# Altium PCB CW308T_D2000.PcbDoc
Units mil, origin at the board's own origin, x right, y up, seen from the top; angles counter-clockwise.
Board outline 2060 x 2540 mil, 2 copper layers (Top Layer, Bottom Layer); 12 components, 25 nets, 128 pads, 130 vias.
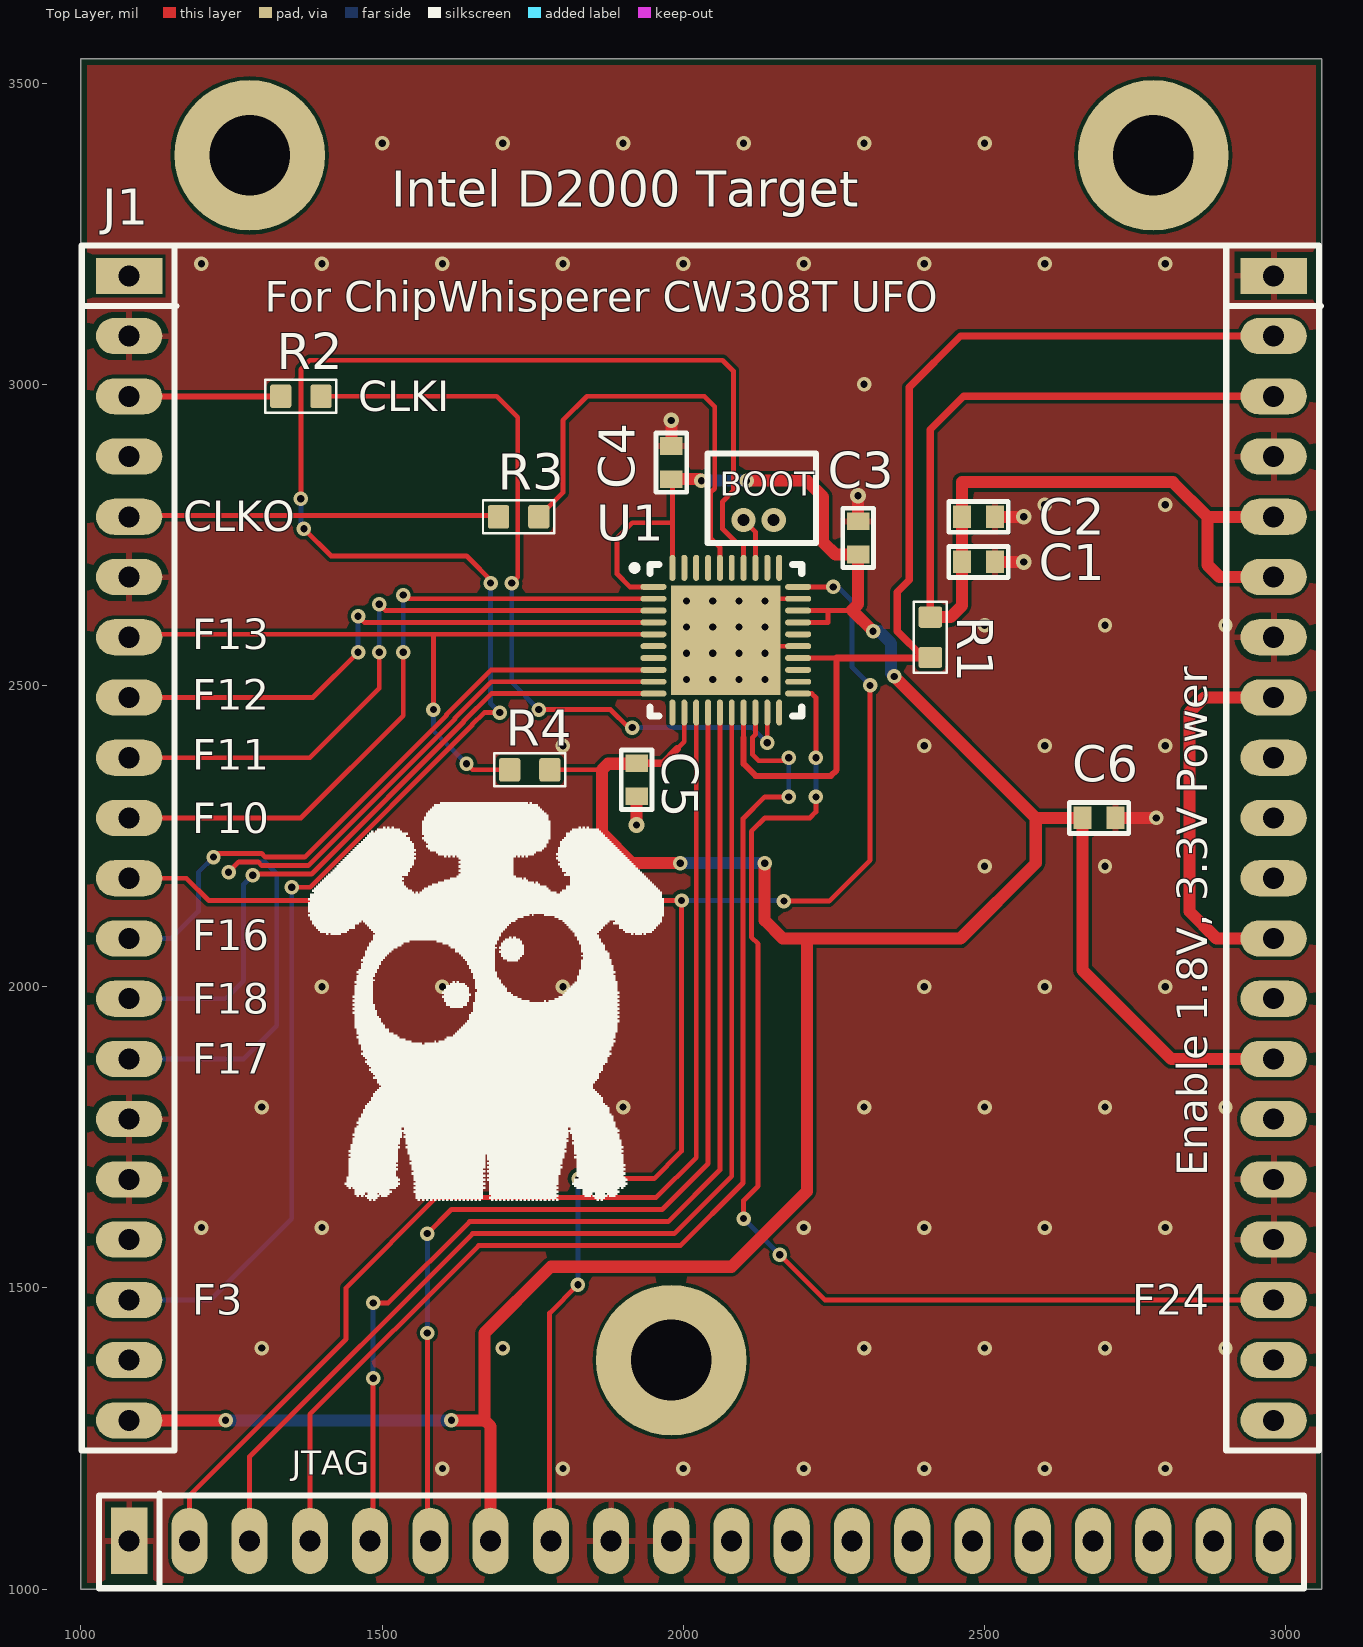
[diagram p0: Top Layer view]
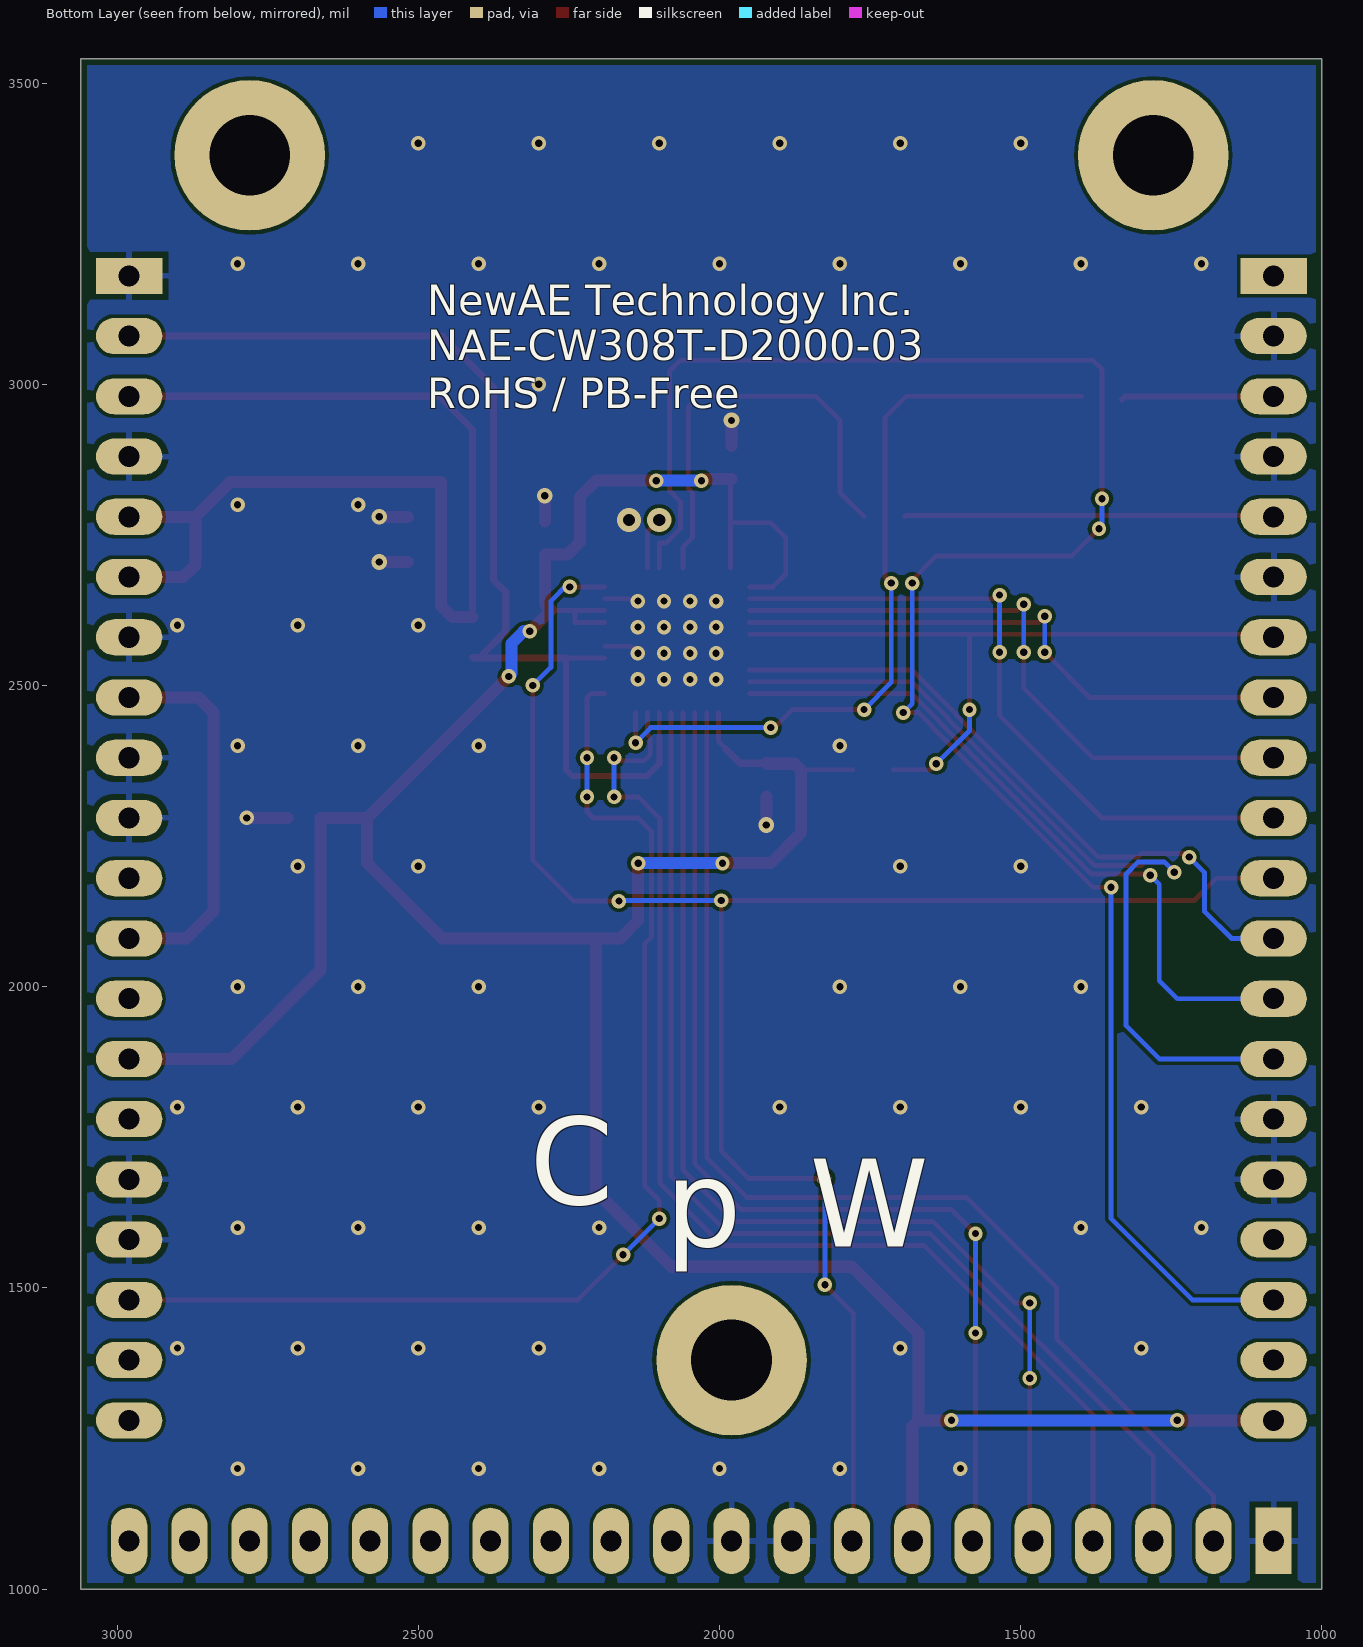
[diagram p1: Bottom Layer view, seen from below]

## Layer stack, top to bottom
Top Solder: solder mask 0.4, Solder Resist, Dk 3.5
Top Layer: signal copper 1.4
Dielectric 1: dielectric 12.6, FR-4, Dk 4.8
Bottom Layer: signal copper 1.4
Bottom Solder: solder mask 0.4, Solder Resist, Dk 3.5

## Board outline
1000,1000 1000,3540 3060,3540 3060,1000

## Design rules (kind name [scope] priority, off if disabled: settings)
BoardOutlineClearance [All] p1: gap=10 ignorepadtopadclearanceinfootprint=FALSE
Clearance [All] p1: gap=6 ignorepadtopadclearanceinfootprint=FALSE except(0: Arc-Hole Track-Hole SMDPad-Hole THPad-Hole Via-Hole Fill-Hole Poly-Hole Region-Hole Text-Hole)
MinimumSolderMaskSliver [All] p1: minsoldermaskwidth=4
PasteMaskExpansion PasteMaskExpansion_1 [InComponent('U1')] p1: expansion=-1.5
PasteMaskExpansion [All] p2: expansion=0
PolygonConnect PolygonConnect_via [isVia] p1: connectstyle=Direct reliefconductorwidth=10 reliefentries=4 polygonreliefangle="90 Angle" airgapwidth=10
PolygonConnect PolygonConnect_other [All] p2: connectstyle=Relief reliefconductorwidth=10 reliefentries=4 polygonreliefangle="90 Angle" airgapwidth=10
RoutingVias [All] p1: holewidth=12 width=24 viastyle="Through Hole" minholewidth=11.81 minwidth=24 maxholewidth=30 maxwidth=50
SilkToSilkClearance [All] p1: silktosilkclearance=1
SilkToSolderMaskClearance [IsPad] p1: minsilkscreentomaskgap=5.5 clearancetoexposedcopper=TRUE
SolderMaskExpansion SolderMaskExpansion_1 [InComponent('U1')] p1: expansion=6
SolderMaskExpansion [All] p2: expansion=4
Width [All] p1: maxlimit=20 minlimit=6 preferedwidth=6 minimp=50.000000 maximp=50.000000 favimp=50.000000
26 further rules are at their usual default settings.

## Components (designator, comment, footprint, x,y, rotation, side; value= is the part's Value field where it differs from the comment)
C1 "100n" CAPC0603_M 2490,2705 r0 top
C2 "100n" CAPC0603_M 2490,2780 r0 top
C3 "100n" CAPC0603_M 2290,2745 r90 top
C4 "100n" CAPC0603_M 1980,2870 r90 top
C5 "100n" CAPC0603_M 1922.28,2343.46 r270 top
C6 "100n" CAPC0603_M 2690,2280 r0 top
J1 "CW308_TARGETCON" CW308_TBOARD_CONN 1080,3180 r0 top locked
R1 "10R" RESC1608X55N 2410,2580 r90 top
R2 "51R" RESC1608X55N 1365,2980 r180 top
R3 "51R" RESC1608X55N 1726.54,2780 r0 top
R4 "4k7" RESC1608X55N 1745,2360 r180 top
U1 "FND2000" QFN50P595X595X90_HS-41M 2070.47,2575.08 r0 top

## Footprints (in the part's own frame and the unit in brackets; to place one, negate y for a bottom-side part, rotate by r counter-clockwise, add the part's x,y. Pads: shape width x height; smd on the part's side, far side on the other; paste and mask are expansions set on the pad)
CAPC0603_M [mm]
  rect 0.75x0.95 smd: 1(-0.7,0) 2(0.7,0)
  silkscreen extent -1.25,-0.65 1.25,0.65, body extent -0.85,-0.45 0.85,0.45, height 0.9
CW308_TBOARD_CONN [mil]
  rect 110x60 hole 35: A1(0,0) C1(1900,0)
  oval 110x60 hole 35: A2(0,-100) A3(0,-200) A4(0,-300) A5(0,-400) A6(0,-500) A7(0,-600) A8(0,-700) A9(0,-800) A10(0,-900) A11(0,-1000) A12(0,-1100) A13(0,-1200) A14(0,-1300) A15(0,-1400) A16(0,-1500) A17(0,-1600) A18(0,-1700) A19(0,-1800) A20(0,-1900) C2(1900,-100) C3(1900,-200) C4(1900,-300) C5(1900,-400) C6(1900,-500) C7(1900,-600) C8(1900,-700) C9(1900,-800) C10(1900,-900) C11(1900,-1000) C12(1900,-1100) C13(1900,-1200) C14(1900,-1300) C15(1900,-1400) C16(1900,-1500) C17(1900,-1600) C18(1900,-1700) C19(1900,-1800) C20(1900,-1900)
  rect 60x110 hole 35: B1(0,-2100)
  oval 60x110 hole 35: B2(100,-2100) B3(200,-2100) B4(300,-2100) B5(400,-2100) B6(500,-2100) B7(600,-2100) B8(700,-2100) B9(800,-2100) B10(900,-2100) B11(1000,-2100) B12(1100,-2100) B13(1200,-2100) B14(1300,-2100) B15(1400,-2100) B16(1500,-2100) B17(1600,-2100) B18(1700,-2100) B19(1800,-2100) B20(1900,-2100)
  round 250 hole 134: MH1(200,200) MH2(900,-1800) MH2(1700,200)
  silkscreen extent -79,-2179 1979,50, body extent -50,-2149 1950,50, height 48
QFN50P595X595X90_HS-41M [mm] "QFN, 40-Leads, Body 5.95x5.95mm, Pitch 0.50mm, Thermal Pad 4.62x4.62mm, IPC Low Density"
  oval 1.1x0.25 smd: 1(-3.05,2.25) 2(-3.05,1.75) 3(-3.05,1.25) 4(-3.05,0.75) 5(-3.05,0.25) 6(-3.05,-0.25) 7(-3.05,-0.75) 8(-3.05,-1.25) 9(-3.05,-1.75) 10(-3.05,-2.25) 21(3.05,-2.25) 22(3.05,-1.75) 23(3.05,-1.25) 24(3.05,-0.75) 25(3.05,-0.25) 26(3.05,0.25) 27(3.05,0.75) 28(3.05,1.25) 29(3.05,1.75) 30(3.05,2.25)
  oval 0.25x1.1 smd: 11(-2.25,-3.05) 12(-1.75,-3.05) 13(-1.25,-3.05) 14(-0.75,-3.05) 15(-0.25,-3.05) 16(0.25,-3.05) 17(0.75,-3.05) 18(1.25,-3.05) 19(1.75,-3.05) 20(2.25,-3.05) 31(2.25,3.05) 32(1.75,3.05) 33(1.25,3.05) 34(0.75,3.05) 35(0.25,3.05) 36(-0.25,3.05) 37(-0.75,3.05) 38(-1.25,3.05) 39(-1.75,3.05) 40(-2.25,3.05)
  rect 4.62x4.62 smd paste-100: 41(0,0)
  silkscreen extent -3.97,-3.2 3.2,3.2, body extent -3,-3 3,3, height 0.9
RESC1608X55N [mm] "Chip Resistor, Body 1.6x0.8mm, EIA 0603, IPC Medium Density"
  round 0.254 on Mech15: 0(0,0)
  rrect25% 0.9x1 smd: 1(-0.85,0) 2(0.85,0)
  Top Layer pour cut-out: -0.6,0.5 -0.4,0.7 0.4,0.7 0.6,0.5 0.6,-0.5 0.4,-0.7 -0.4,-0.7 -0.6,-0.5
  silkscreen extent -1.5,-0.7 1.5,0.7, body extent -0.87,-0.47 0.88,0.48, height 0.54

## Part data
C1 C2 C3 C4 C5 C6: library part CCHIP-100n-0603, "100n, 0603", Case-EIA=0603, Case-Metric=1608, Component Type=Standard, Mounting Technology="Surface Mount", Part Number=CCHIP-100n-0603, Pin Count=2
J1: library part CW308_TBOARD, "CW308 \"Standard\" Target Board Connector"
R1: library part RCHIP-10R-0603, "10R, 0603", Case-EIA=0603, Case-Metric=1608, Component Type=Standard, Mounting Technology="Surface Mount", Part Number=RCHIP-10R-0603, Pin Count=2
R2 R3: library part RCHIP-51R-0603, "51R, 0603", Case-EIA=0603, Case-Metric=1608, Component Type=Standard, Mounting Technology="Surface Mount", Part Number=RCHIP-51R-0603, Pin Count=2
R4: library part RCHIP-4K7-0603, "4k7 res, 0603, 1%, 1/10W", Case-EIA=0603, Case-Metric=1608, Manufacture 1=Yageo, Manufacture Part Number 1=RC0603FR-074K7L, Rated Power=0.1W, Rated Voltage=75VDC, Supplier Part Number 1=311-4.70KHRCT-ND, Temperature Range="-55C to 155C", Tolerance=1%, Component Type=Standard, Mounting Technology=SMT, Part Number=RCHIP-4K7-0603, Pin Count=2, Supplier 1=Digi-Key
U1: library part D2000, "Intel x86 microcontroller", Manufacture 1=Intel, Manufacture Part Number 1="FND2000 S R2KF", Component Type=Standard, Part Number=D2000, Pin Count=41, Supplier 1=Arrow

## Via types
v1: diameter 24, hole 12, Top Layer to Bottom Layer, tented both sides, 88 vias
v2: diameter 24, hole 12, Top Layer to Bottom Layer, 19 vias
v3: diameter 24.02, hole 11.81, Top Layer to Bottom Layer, 16 vias
v4: diameter 26, hole 12, Top Layer to Bottom Layer, 5 vias
v5: diameter 40, hole 20, Top Layer to Bottom Layer, 2 vias

## Nets (pads, with @x,y where several pads share a name; then routed paths per layer and width w, separated by ;. In a path a pad name is that pad's centre, name@x,y a point inside that pad or via, vN(x,y) a via of type N, cw(c..) or ccw(c..) an arc to the next point about the centre after c; other vN are vias at no path point)
BOOTEN: U1.33 | length 88
  Top Layer w8: v5(2100,2775) 2119.68,2755.32 U1.33
CLKIN: J1.A3 R2.2 | length 253.6
  Top Layer w10: J1.A3 1326.54,2980 R2.2@1331.54,2975
CLKOUT: J1.A5 R3.1 | length 614.7
  Top Layer w8: J1.A5 1082,2782 1691.07,2782 R3.1
CS: J1.A18 U1.34 | length 3274.4
  Top Layer w8: v1(1350,2165) 1380.51,2165 1649,2433.49 1649,2434.6 1669.4,2455 v1(1695,2455) ; v1(1365,2810) 1365,3025 1380,3040 2065,3040 2082.98,3022.02 2082.98,2822.98 2065,2805 2065,2760 2088.5,2736.5 2100,2736.5 U1.34 ; v1(1370,2760) 1415,2715 1640,2715 1685,2670 v1(1680,2670)
  Bottom Layer w8: J1.A18 1215,1480 1350,1615 v1(1350,2165) ; v1(1365,2810) 1365,2765 v1(1370,2760) ; v1(1680,2670) 1680,2470 v1(1695,2455)
GND: C1.2 C2.2 C3.2 C4.2 C5.2 C6.2 J1.A2 J1.A4 J1.A6 J1.A15 J1.A16 J1.B1 J1.B9 J1.B10 J1.C1 J1.C4 J1.C7 J1.C9 J1.C10 J1.C16 J1.C17 U1.25 U1.29 U1.41 | length 411.4
  Top Layer w8: v3(2135.43,2553.43) 2147.24,2565.24 U1.25 ; v3(2135.43,2640.04) 2139.37,2643.98 U1.29
  Top Layer w20: v4(1922.28,2268.46) C5.2 ; C4.2 v4(1980,2940) ; C3.2 v4(2290,2815) ; C1.2 v4(2565,2705) ; C2.2 v4(2565,2780) ; C6.2 v2(2785,2280)
  other v1: 1600,1200 1800,1200 2000,1200 2200,1200 2400,1200 2600,1200 2800,1200 1300,1400 1700,1400 2300,1400 2500,1400 2700,1400 2900,1400 1200,1600 1400,1600 2200,1600 2400,1600 2600,1600 2800,1600 1300,1800 1500,1800 1700,1800 1900,1800 2300,1800 2500,1800 2700,1800 2900,1800 1400,2000 1600,2000 1800,2000 2400,2000 2600,2000 2800,2000 1500,2200 1700,2200 2500,2200 2700,2200 1800,2400 2400,2400 2600,2400 2800,2400 2500,2600 2700,2600 2900,2600 2600,2800 2800,2800 2300,3000 1200,3200 1400,3200 1600,3200 1800,3200 2000,3200 2200,3200 2400,3200 2600,3200 2800,3200 1500,3400 1700,3400 1900,3400 2100,3400 2300,3400 2500,3400
  other v3: 2005.51,2510.12 2048.82,2510.12 2092.13,2510.12 2135.43,2510.12 2005.51,2553.43 2048.82,2553.43 2092.13,2553.43 2005.51,2596.73 2048.82,2596.73 2092.13,2596.73 2135.43,2596.73 2005.51,2640.04 2048.82,2640.04 2092.13,2640.04
  other v5: 2150,2775
GPIO3: J1.A9 U1.3 | length 1062.5
  Top Layer w8: J1.A9 1380,2380 1495,2495 v2(1495,2555) ; v2(1495,2635) 1505.71,2624.29 U1.3
  Bottom Layer w8: v2(1495,2555) v2(1495,2635)
GPIO4: J1.A10 U1.2 | length 1143.3
  Top Layer w8: J1.A10 1365,2280 1535,2450 v2(1535,2555) ; v2(1535,2650) 1541.02,2643.98 U1.2
  Bottom Layer w8: v2(1535,2555) v2(1535,2650)
LED1: J1.C18 U1.21 | length 1935.8
  Top Layer w8: v1(2100,1615) 2100,1645 2124,1669 2124,2071 2113,2082 2113,2258 2135,2280 2210,2280 2220,2290 v1(2220,2315) ; v1(2160,1555) 2235,1480 J1.C18 ; U1.21 2213.5,2486.5 2220,2480 v1(2220,2380)
  Bottom Layer w8: v1(2100,1615) v1(2160,1555) ; v1(2220,2315) v1(2220,2380)
MISO: J1.A13 U1.10 | length 1174.6
  Top Layer w8: v1(1285,2185) 1287,2187 1382.71,2187 1635,2439.29 1635,2440.4 1681.09,2486.5 U1.10
  Bottom Layer w8: J1.A13 1240,1980 1270,2010 1270,2170 v1(1285,2185)
MOSI: J1.A14 U1.9 | length 1457.1
  Top Layer w8: v1(1245,2190) 1262,2207 1294.11,2207 1300.11,2201 1376.91,2201 1621,2445.09 1621,2446.2 1680.98,2506.18 U1.9
  Bottom Layer w8: J1.A14 1270,1880 1325,1935 1325,2187 1305,2207 1262,2207 v1(1245,2190)
NetJ1_C8: J1.C8 J1.C12 | length 639
  Top Layer w20: J1.C12 2885,2080 2840,2125 2840,2455 2865,2480 J1.C8
NetR2_1: R2.1 U1.19 | length 1306.9
  Top Layer w8: R2.1 1690,2980 1725,2945 1725,2680 v2(1715,2670) ; v1(1760,2460) 1879.06,2460 1909.06,2430 v1(1915,2430) ; v2(2139.37,2405) U1.19
  Bottom Layer w8: v2(1715,2670) 1715,2505 v1(1760,2460) ; v1@1909.06,2430 v1(1915,2430) 2114.37,2430 v2(2139.37,2405)
NetR3_2: R3.2 U1.36 | length 729.4
  Top Layer w8: R3.2 1800,2820 1800,2940 1840,2980 2035,2980 2052,2963 2052,2827 2045,2820 2045,2745 2060.63,2729.37 U1.36
NRST: J1.A11 J1.B8 U1.30 | length 3054.4
  Top Layer w8: J1.A11 1175,2180 1212,2143 v2(1997,2143) 1997,1727 1995,1725 1951.35,1681.35 v1(1826.01,1681.35) ; J1.B8 1778,1082 1778,1458 v1(1825,1505) ; v2(2167,2142) 2242,2142 2310,2210 v2(2310,2500) ; U1.30 v2(2248.66,2663.66)
  Bottom Layer w8: v1(1825,1505) 1825,1680.35 v1(1826.01,1681.35) ; v2(1997,2143) 2166,2143 v2(2167,2142) ; v2(2248.66,2663.66) 2252.32,2660 2252.32,2667.68 2280,2640 2280,2530 v2(2310,2500)
RXD: J1.A7 R4.2 U1.5 | length 1185.8
  Top Layer w8: J1.A7 1084.92,2584.92 1585,2584.92 ; v1(1585,2460) 1585,2584.92 ; v1(1640,2370) 1650,2360 R4.2 ; U1.5 1585,2584.92
  Bottom Layer w8: v1(1585,2460) 1585,2425 v1(1640,2370)
SCK: J1.A12 U1.8 | length 1098.8
  Top Layer w8: v1(1220,2215) 1226,2221 1299.91,2221 1305.91,2215 1371.11,2215 1607,2450.89 1607,2452 1680.87,2525.87 U1.8
  Bottom Layer w8: J1.A12 1150,2080 1195,2125 1195,2190 v1(1220,2215)
SHUNTL: J1.C2 R1.1 U1.17 U1.24 | length 1784.1
  Top Layer w8: 2100,2413.66 U1.17 ; U1.24 2254.45,2545.55
  Top Layer w10: 2100,2413.66 2100,2370 2120,2350 2245,2350 2254.45,2359.45 2254.45,2545.55
  Top Layer w12: 2254.45,2545.55 2409.02,2545.55 R1.1 2398.46,2546.54 2355,2590 2355,2655 2375,2675 2375,2995 2460,3080 J1.C2
TCK: J1.B6 U1.14 | length 1775.1
  Top Layer w8: v2(1575,1425) 1575,1085 J1.B6 ; v2(1575,1590) 1615,1630 1965,1630 2040.94,1705.94 U1.14
  Bottom Layer w8: v2(1575,1425) v2(1575,1590)
TDI: J1.B3 U1.16 | length 1902.7
  Top Layer w8: J1.B3 1280,1220 1650,1590 1985,1590 2080.32,1685.32 U1.16
TDO: J1.B4 U1.18 | length 1997.1
  Top Layer w8: J1.B4 1380,1290 1660,1570 1995,1570 2099,1674 2099,2279 2135,2315 v2(2175,2315) v2@2170,2320 ; U1.18 2119.68,2418.35 2115,2413.66 2115,2385 2125,2375 2175,2375 v2(2175,2380)
  Bottom Layer w8: v2(2175,2315) v2(2175,2380)
TMS: J1.B5 U1.15 | length 1823.5
  Top Layer w8: J1.B5 1485,1085 v2(1485,1350) ; v2(1485,1475) 1510.2,1475 1645.2,1610 1975,1610 2060.63,1695.63 U1.15
  Bottom Layer w8: v2(1485,1350) v2(1485,1475)
TRST: J1.B2 U1.13 | length 1937.3
  Top Layer w8: J1.B2 1180,1155 1440,1415 1440,1500 1590,1650 1955,1650 2021.26,1716.26 U1.13
TXD: J1.A8 U1.4 | length 965.8
  Top Layer w8: J1.A8 1385,2480 v2(1460,2555) ; v2(1460,2615) 1470.39,2604.61 U1.4
  Bottom Layer w8: v2(1460,2555) v2(1460,2615)
VCC: C3.1 C4.1 C5.1 C6.1 J1.A20 J1.B7 J1.C14 R4.1 U1.1 U1.12 U1.27 U1.28 U1.40 | length 5590.8
  Top Layer w8: R4.1 1865,2360 ; U1.1 1911.34,2663.66 1890,2685 1890,2745 1915,2770 1981.89,2770 ; C4.1 1981.89,2840.55 1981.89,2770 ; U1.40 1981.89,2770 ; 1990,2395 2001.57,2406.57 U1.12 ; U1.27 2240,2604.61 2240,2624.29 ; U1.28 2240,2624.29 ; 2280,2625 2279.29,2624.29 2240,2624.29
  Top Layer w12: C5.1 1966.02,2371.02 1990,2395
  Top Layer w20: J1.A20 v1(1240,1280) ; v1(1615,1280) 1670,1280 ; J1.B7 1680,1270 1670,1280 ; C5.1 1921.26,2370 1875,2370 1865,2360 1865,2255 1915,2205 v1(1995,2205) ; C4.1 2027.56,2842.44 v1(2030,2840) ; v1(2105,2840) 2205,2840 2231.89,2813.11 2231.89,2737.99 2252.44,2717.44 C3.1 2290,2635 2280,2625 v1(2315,2590) ; v1(2135,2205) 2135,2110 2165,2080 2210,2080 ; v1(2350,2515) 2585,2280 ; J1.C14 2810,1880 2662.44,2027.56 C6.1 2585,2280 ; 1670,1280 1670,1425 1780,1535 2080,1535 2205,1660 2205,2075 2210,2080 ; 2210,2080 2460,2080 2585,2205 2585,2280
  Bottom Layer w20: v1(1240,1280) v1(1615,1280) ; v1(1995,2205) v1(2135,2205) ; v1(2030,2840) v1(2105,2840) ; v1(2315,2590) 2325,2590 2345,2570 2345,2520 v1(2350,2515)
VCCINT: C1.1 C2.1 J1.C3 J1.C5 J1.C6 R1.2 | length 1909.3
  Top Layer w12: R1.2 2410,2925 2465,2980 J1.C3
  Top Layer w20: R1.2 2443.46,2613.46 2462.44,2632.44 C1.1 C2.1 2462.44,2837.44 2812.56,2837.44 2870,2780 ; J1.C6 2890,2680 2870,2700 2870,2780 ; J1.C5 2870,2780
pads on no net: J1.A1 J1.A17 J1.A19 J1.B11 J1.B12 J1.B13 J1.B14 J1.B15 J1.B16 J1.B17 J1.B18 J1.B19 J1.B20 J1.C11 J1.C13 J1.C15 J1.C19 J1.C20 J1.MH1 J1.MH2 R1.0 R2.0 R3.0 R4.0 U1.6 U1.7 U1.11 U1.20 U1.22 U1.23 U1.26 U1.31 U1.32 U1.35 U1.37 U1.38 U1.39

## Polygon pours and split planes (outlines as drawn)
GND on Bottom Layer "GND" (solid, pour order 0): 980,3630 965,3615 965,770 3140,770 3170,800 3200,830 3200,3630
GND on Top Layer "GNDTOP" (solid, remove dead copper, pour order 2): 980,3630 975,3625 975,970 3095,970 3100,975 3090,985 3090,3640

## Silkscreen, mask and mechanical layers (free items; w line width, h text height)
Top Overlay:
  drawing of 8 lines, arcs and shapes, not listed
  text "Intel D2000 Target" at 1515,3295 h60
  text "For ChipWhisperer CW308T UFO" at 1305,3120 h50
  text "CLKI" at 1460,2955 h50
  text "BOOT" at 2060,2815 h40
  text "CLKO" at 1170,2756 h50
  text "F13" at 1185,2560 h50
  text "F12" at 1185,2460 h50
  text "F11" at 1185,2360 h50
  text "F10" at 1185,2255 h50
  text "F16" at 1185,2060 h50
  text "F18" at 1185,1955 h50
  text "F17" at 1185,1855 h50
  text "Enable 1.8V, 3.3V Power" at 2870,1685 h50 r90
  text "F3" at 1185,1455 h50
  text "F24" at 2745,1455 h50
  text "JTAG" at 1350,1190 h40
Bottom Overlay:
  text "NewAE Technology Inc." at 2485,3115 h50
  text "NAE-CW308T-D2000-03" at 2485,3040 h50
  text "RoHS / PB-Free" at 2485,2960 h50
  text "C" at 2315,1590 h250
  text "W" at 1850,1520 h250
  text "p" at 2090,1520 h250
Mechanical 1:
  the board outline again, w15